# Altium PCB DC_Module_2022-03-10.pcbdoc
Units mil, origin at the board's own origin, x right, y up, seen from the top; angles counter-clockwise.
Board outline 5697 x 3337.5 mil, 2 copper layers (Top Layer, Bottom Layer); 28 components, 44 nets, 104 pads, 0 vias.
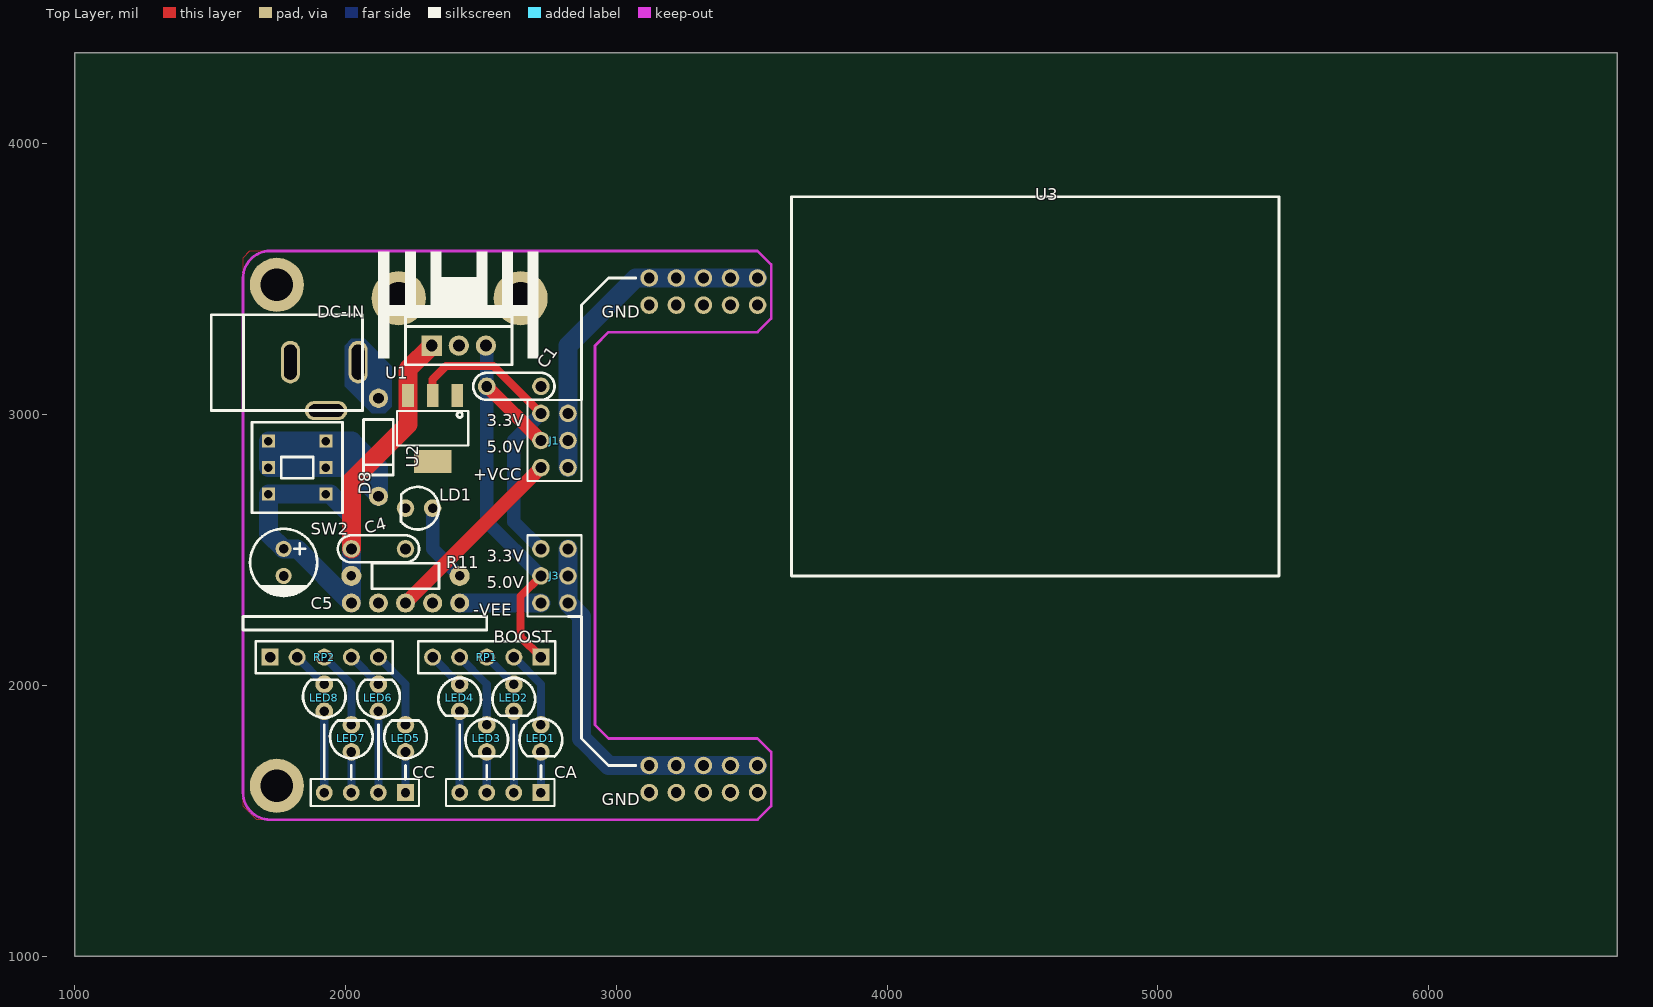
[diagram p0: Top Layer view]
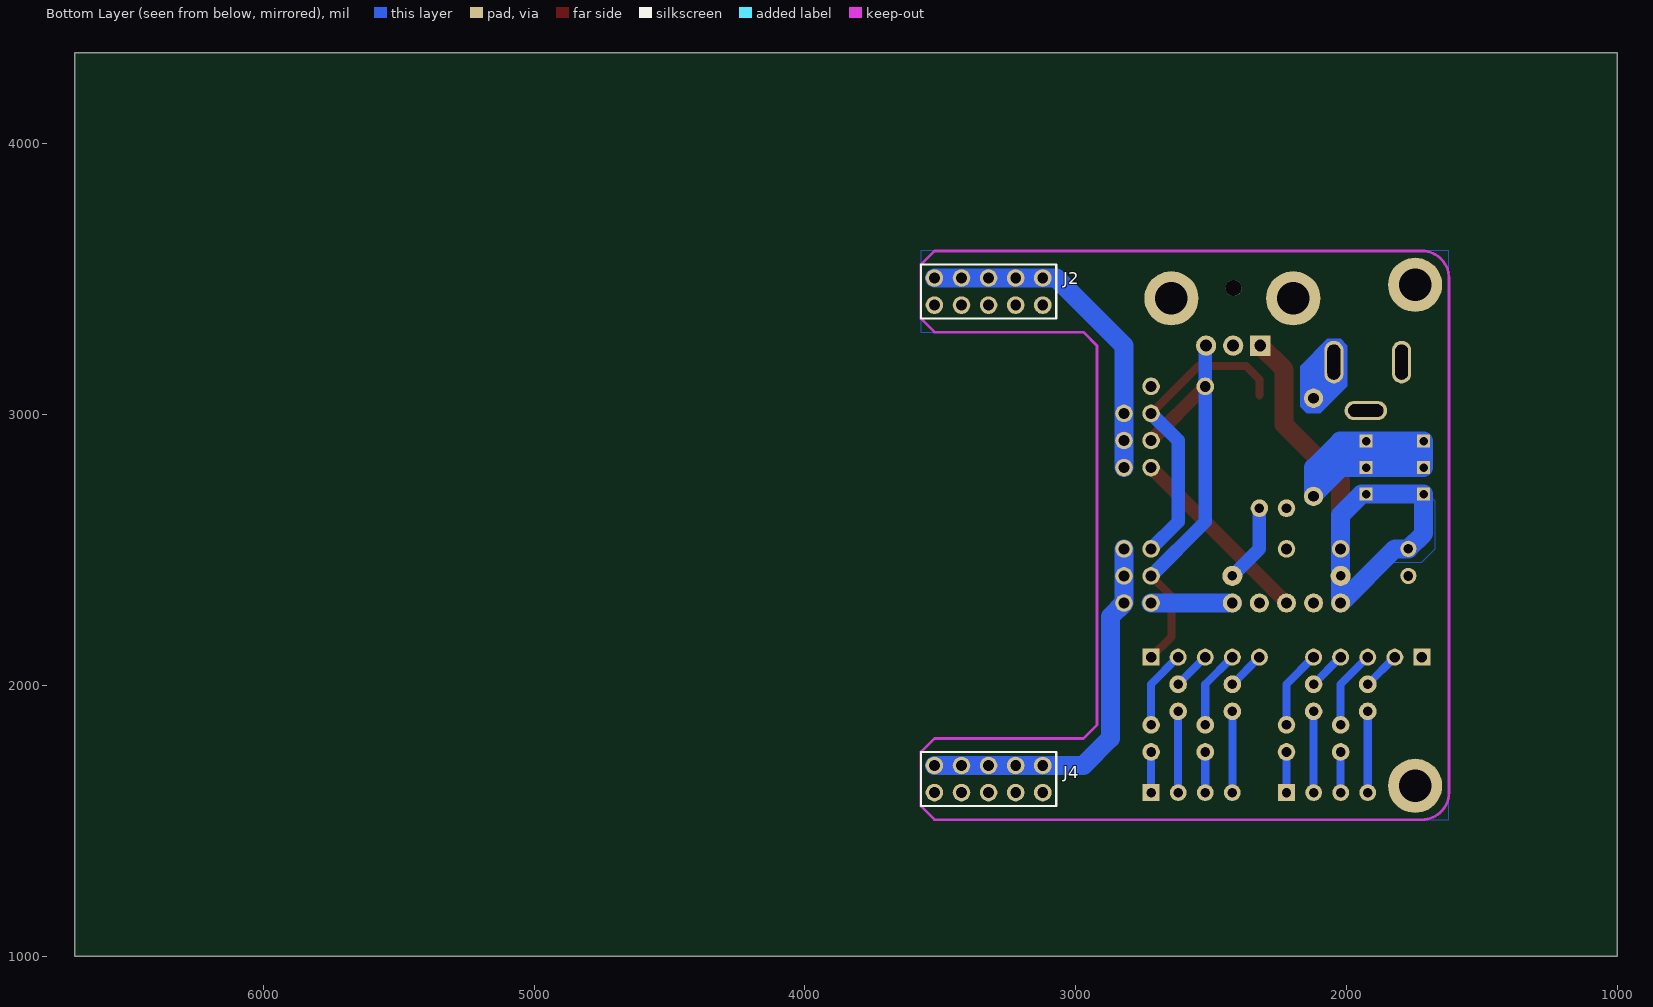
[diagram p1: Bottom Layer view, seen from below]

## Layer stack, top to bottom
Top Layer: signal copper (thickness not stored)
Dielectric: dielectric 12.6, FR-4, Dk 4.8
Bottom Layer: signal copper (thickness not stored)

## Board outline
6697,1000 1000,1000 1000,4337.5 6697,4337.5

## Components (designator, comment, footprint, x,y, rotation, side; value= is the part's Value field where it differs from the comment)
BOOST "HDR-F-2.54_1x5" DUAL_SUPPLY_BOOSTER 2022,2305 r90 top
C1 "0.1u" CAP200 2722,3105 r180 top
C4 "0.1u" CAP200 2222,2505 r180 top
C5 "1u" CAP-D6.3×F2.5 1772,2455 r270 top
CA "HDR-F-2.54_1x4" HDR-F-2.54_1X4 2572,1605 r180 top
CC "HDR-F-2.54_1x4" HDR-F-2.54_1X4 2072,1605 r180 top
D8 "1N4007" DO-41_BD2.4-L4.7-P8.70-D0.9-RD 2122,2880 r90 top
DC-IN "DC-072-165A" DC-IN-TH_DC-072-165A 1922,3105 r0 top
J1 "HDR-M-2.54_2x3" HDR-M-2.54_2X3 2722,3005 r270 top
J2 "HDR-M-2.54_2x5" HDR-M-2.54_2X5 3322,3455 r180 bottom
J3 "HDR-M-2.54_2x3" HDR-M-2.54_2X3 2722,2505 r270 top
J4 "HDR-M-2.54_2x5" HDR-M-2.54_2X5 3322,1655 r180 bottom
LD1 "LED-TH-3mm_B" LED-TH_BD3.0_BLUE 2272,2655 r270 top
LED1 "LED-TH-3mm_R" LED-TH_BD3.0_RED 2722,1805 r0 top
LED2 "LED-TH-3mm_R" LED-TH_BD3.0_RED 2622,1955 r0 top
LED3 "LED-TH-3mm_R" LED-TH_BD3.0_RED 2522,1805 r0 top
LED4 "LED-TH-3mm_R" LED-TH_BD3.0_RED 2422,1955 r0 top
LED5 "LED-TH-3mm_R" LED-TH_BD3.0_RED 2222,1805 r180 top
LED6 "LED-TH-3mm_R" LED-TH_BD3.0_RED 2122,1955 r180 top
LED7 "LED-TH-3mm_R" LED-TH_BD3.0_RED 2022,1805 r180 top
LED8 "LED-TH-3mm_R" LED-TH_BD3.0_RED 1922,1955 r180 top
R11 "220" R_AXIAL-0.4 2222,2405 r180 top
RP1 "220" RES-ARRAY-TH_5P-P2.54-D1.0 2522,2105 r180 top
RP2 "220" RES-ARRAY-TH_5P-P2.54-D1.0 1922,2105 r0 top
SW2 "SW_PUSH_DPDT" SW_PUSH_BUTTON_MINI 1822,2805 r90 top
U1 "7805(TO-220)" HEATSINK 2122,3405 r0 top
U2 "AMS1117" SOT223 2322,2955 r180 top
U3 "BREADBOARD-MINI" BREADBOARD-MINI 3647,2405 r0 top

## Footprints (in the part's own frame and the unit in brackets; to place one, negate y for a bottom-side part, rotate by r counter-clockwise, add the part's x,y. Pads: shape width x height; smd on the part's side, far side on the other; paste and mask are expansions set on the pad)
BREADBOARD-MINI [mil]
  silkscreen extent 0,0 1800,1400
CAP200 [mil]
  round 65 hole 40: 1(0,0) 2(200,0)
  silkscreen extent -50,-50 250,50
CAP-D6.3×F2.5 [mil]
  round 60 hole 36: 1(-50,0) 2(50,0)
  silkscreen extent -124,-124 125,124
DC-IN-TH_DC-072-165A [mm]
  oval 1.8x4 hole 1.2 slot 3.3 at 90 deg: 1(3.175,2.273) 2(-3.175,2.273)
  oval 4x1.8 hole 1.2 slot 3.3 at 0 deg: 3(0.178,-2.273)
  silkscreen extent -10.59,-2.28 3.58,6.73
DO-41_BD2.4-L4.7-P8.70-D0.9-RD [mm]
  round 1.8 hole 1: 1(-4.6,0) 2(4.6,0)
  silkscreen extent -2.6,-1.4 2.6,1.4
DUAL_SUPPLY_BOOSTER [mil]
  round 70 hole 40: 1(0,0) 2(0,-100) 3(0,-200) 4(0,-300) 5(0,-400)
  silkscreen extent -100,-500 -50,400
HDR-F-2.54_1X4 [mil]
  rect 62x62 hole 35: 1(-150,0)
  round 62 hole 35: 2(-50,0) 3(50,0) 4(150,0)
  silkscreen extent -200,-50 200,50
HDR-M-2.54_2X3 [mil]
  round 65 hole 40: 1(0,0) 2(0,100) 3(100,0) 4(100,100) 5(200,0) 6(200,100)
  silkscreen extent -50,-50 250,150
HDR-M-2.54_2X5 [mil]
  round 65 hole 40: 1(200,50) 2(200,-50) 3(100,50) 4(100,-50) 5(0,50) 6(0,-50) 7(-100,50) 8(-100,-50) 9(-200,50) 10(-200,-50)
  silkscreen extent -250,-100 250,100
HEATSINK [mil]
  rect 75x75 hole 44: 1(196.87,-149.59)
  round 75 hole 44: 2(296.9,-149.6) 3(396.9,-149.6)
  round 59.06 hole 59.06 unplated: ""(295.3,63)
  silkscreen extent 0,-220 591,197
LED-TH_BD3.0_BLUE [mil]
  round 65 hole 35.43: 1(0,50) 2(0,-50)
  silkscreen extent -79,-66 79,73
LED-TH_BD3.0_RED [mil]
  round 65 hole 35.43: 1(0,50) 2(0,-50)
  silkscreen extent -79,-66 79,73
R_AXIAL-0.4 [mil]
  round 74 hole 35.4: 1(-200,0) 2(200,0)
  silkscreen extent -124,-47 124,47
RES-ARRAY-TH_5P-P2.54-D1.0 [mm]
  rect 1.6x1.6 hole 1: 1(-5.08,0)
  round 1.6 hole 1: 2(-2.54,0) 3(0,0) 4(2.54,0) 5(5.08,0)
  silkscreen extent -6.42,-1.5 6.42,1.5
SOT223 [mil]
  rect 43x85 smd: 1(-91,-117) 2(0,-117) 3(91,-117)
  rect 138x85 smd: 4(0,127)
  silkscreen extent -132,-59 132,69
SW_PUSH_BUTTON_MINI [mil]
  rect 47.2x47.2 hole 31.4: 1(98,106) 2(0,106) 3(-98,106) 4(98,-106) 5(0,-106) 6(-98,-106)
  silkscreen extent -167,-167 167,167

## Free pads (board coordinates)
  round 200 hole 120: 1(1747,1630) 1(1747,3480) 1(2197,3430) 1(2647,3430)

## Nets (pads, with @x,y where several pads share a name; then routed paths per layer and width w, separated by ;. In a path a pad name is that pad's centre, name@x,y a point inside that pad or via, vN(x,y) a via of type N, cw(c..) or ccw(c..) an arc to the next point about the centre after c; other vN are vias at no path point)
BOOST1_3: BOOST.3 J1.5 | length 707.1
  Top Layer w50: BOOST.3 J1.5
BOOST1_5: BOOST.5 J3.5 | length 300
  Bottom Layer w70: BOOST.5 2622,2305 J3.5
DC2_1: D8.2 DC-IN.1
G0: BOOST.2 BOOST.4 C1.1 C4.1 C5.2 DC-IN.2 DC-IN.3 J2.2 J2.4 J2.6 J2.8 J2.10 J4.2 J4.4 J4.6 J4.8 J4.10 LD1.2 pad.1@2197,3430 pad.1@2647,3430 RP2.1 U1.2 U2.1
J1_2: J1.2 J1.4 J1.6 J2.1 J2.3 J2.5 J2.7 J2.9 | length 1253.6
  Bottom Layer w70: J1.6 J1.4 J1.2 2822,3255 3072,3505 3272,3505 3372,3505 3472,3505 J2.9
J3_2: J3.2 J3.4 J3.6 J4.1 J4.3 J4.5 J4.7 J4.9 | length 1412.1
  Bottom Layer w70: J3.2 J3.4 J3.6 2872,2255 2872,2105 2872,1855 2872,1805 2972,1705 3272,1705 3372,1705 3472,1705 J4.9
LED1_1: LED1.1 RP1.2 | length 291.4
  Bottom Layer w30: RP1.2 2722,2005 LED1.1
LED1_2: CA.1 LED1.2 | length 150
  Bottom Layer w30: CA.1 LED1.2
LED2_1: LED2.1 RP1.3 | length 141.4
  Bottom Layer w30: RP1.3 LED2.1
LED2_2: CA.2 LED2.2 | length 300
  Bottom Layer w30: CA.2 LED2.2
LED3_1: LED3.1 RP1.4 | length 291.4
  Bottom Layer w30: RP1.4 2522,2005 LED3.1
LED3_2: CA.3 LED3.2 | length 150
  Bottom Layer w30: CA.3 LED3.2
LED4_1: LED4.1 RP1.5 | length 141.4
  Bottom Layer w30: RP1.5 LED4.1
LED4_2: CA.4 LED4.2 | length 300
  Bottom Layer w30: CA.4 LED4.2
LED5_1: CC.1 LED5.1 | length 150
  Bottom Layer w30: CC.1 LED5.1
LED5_2: LED5.2 RP2.5 | length 291.4
  Bottom Layer w30: RP2.5 2222,2005 LED5.2
LED6_1: CC.2 LED6.1 | length 300
  Bottom Layer w30: CC.2 LED6.1
LED6_2: LED6.2 RP2.4 | length 141.4
  Bottom Layer w30: RP2.4 LED6.2
LED7_1: CC.3 LED7.1 | length 150
  Bottom Layer w30: CC.3 LED7.1
LED7_2: LED7.2 RP2.3 | length 291.4
  Bottom Layer w30: RP2.3 2022,2005 LED7.2
LED8_1: CC.4 LED8.1 | length 300
  Bottom Layer w30: CC.4 LED8.1
LED8_2: LED8.2 RP2.2 | length 141.4
  Bottom Layer w30: RP2.2 LED8.2
R11_1: LD1.1 R11.1 | length 291.4
  Bottom Layer w50: LD1.1 2322,2505 R11.1
S$661: 
S$686: 
S$689: 
S$781: 
S$783: 
S$785: 
S$1012: 
S$1014: 
S$2184: 
S$2186: 
S$2188: 
S$2190: 
S$2192: 
S$2194: 
S$2196: 
S$2198: 
S$2288: 
SW2_2: D8.1 SW2.1 SW2.2 SW2.4 SW2.5 | length 1551.9
  Bottom Layer w70: 1716,2855 2022,2855 2122,2754.6 ; SW2.2 SW2.1 2024,2903 2122,2805 D8.1 2122,2705 2022,2805 SW2.5 SW2.2
U1_3: C1.2 J1.3 J3.3 RP1.1 U1.3 | length 1579.5
  Top Layer w30: RP1.1 2647,2180 2647,2330 J3.3
  Top Layer w50: C1.2 J1.3
  Bottom Layer w50: U1.3 2522,3252.3 C1.2 2522,2605 J3.3
U2_2: J1.1 J3.1 U2.2 | length 1134
  Top Layer w30: U2.2 2322,3130 2372,3180 2547,3180 J1.1
  Bottom Layer w50: J3.1 2622,2605 2622,2905 J1.1
U2_3: BOOST.1 C4.2 C5.1 R11.2 SW2.3 SW2.6 U1.1 U2.3 | length 2094.3
  Top Layer w70: C4.2 2022,2755 2231,2964 2231,3097 2231,3167.54 U1.1
  Bottom Layer w70: 1716,2561 C5.1 1822,2505 BOOST.1 C4.2 2022,2630 1945,2707 SW2.6 SW2.3 1716,2561
pads on no net: U1. U2.4

## Polygon pours and split planes (outlines as drawn)
U2_3 on Bottom Layer (solid): 1722,2455 1672,2505 1672,2680 1697,2705 1922,2705 1997,2630 2022,2630 2022,2305 1872,2455 1722,2455
G0 on Bottom Layer (solid): 1622,1505 1622,3605 3572,3605 3572,3305 2972,3305 2922,3255 2922,1855 2972,1805 3522,1805 3572,1755 3572,1555 3522,1505 1622,1505
G0 on Top Layer (solid): 1672,1505 1622,1555 1622,3580 1647,3605 3522,3605 3572,3555 3572,3355 3522,3305 2972,3305 2922,3255 2922,1855 2972,1805 3522,1805 3572,1755 3572,1555 3522,1505 1672,1505

## Keep-outs
Keep-Out Layer:
  lines w10 net S$661: 1622,1605 ccw(c1722,1605) 1722,1505
  lines w10 net S$689: 1622,3505 cw(c1722,3505) 1722,3605

## Other copper
Bottom Layer:
  region net DC2_1: 2022,3280 1997,3255 1997,3105 2097,3005 2147,3005 2172,3030 2172,3180 2072,3280 2022,3280

## Silkscreen, mask and mechanical layers (free items; w line width, h text height)
Top Overlay:
  lines w10 net S$1014: 2822,2255 2872,2255 2872,1805 2972,1705 3072,1705
  lines w10 net S$2184: 2722,1655 2722,1705
  lines w10 net S$2186: 2622,1655 2622,1855
  lines w10 net S$2188: 2522,1655 2522,1705
  lines w10 net S$2190: 2422,1655 2422,1855
  lines w10 net S$2192: 2220.57,1655 2222,1656.43 2222,1705
  lines w10 net S$2194: 2121.9,1655 2122,1655.1 2122,1855
  lines w10 net S$2196: 2022,1655 2022,1705
  lines w10 net S$2198: 1922,1855 1922,1657.57 1924.57,1655
  lines w10 net S$2288: 2872,3055 2872,3405 2972,3505 3072,3505
  text "GND" at 2947,3357.5 h45
  text "3.3V" at 2522,2957.5 h45
  text "5.0V" at 2522,2859.41 h45
  text "+VCC" at 2472,2757.5 h45
  text "3.3V" at 2522,2457.5 h45
  text "5.0V" at 2522,2359.41 h45
  text "-VEE" at 2472,2257.5 h45
  text "GND" at 2947,1557.5 h45
Document:
  lines w0.1: 3848.49,2668.74 3848.51,2668.76